# EAGLE board Schematic_without_SD_Card (EAGLE 9.6.2)
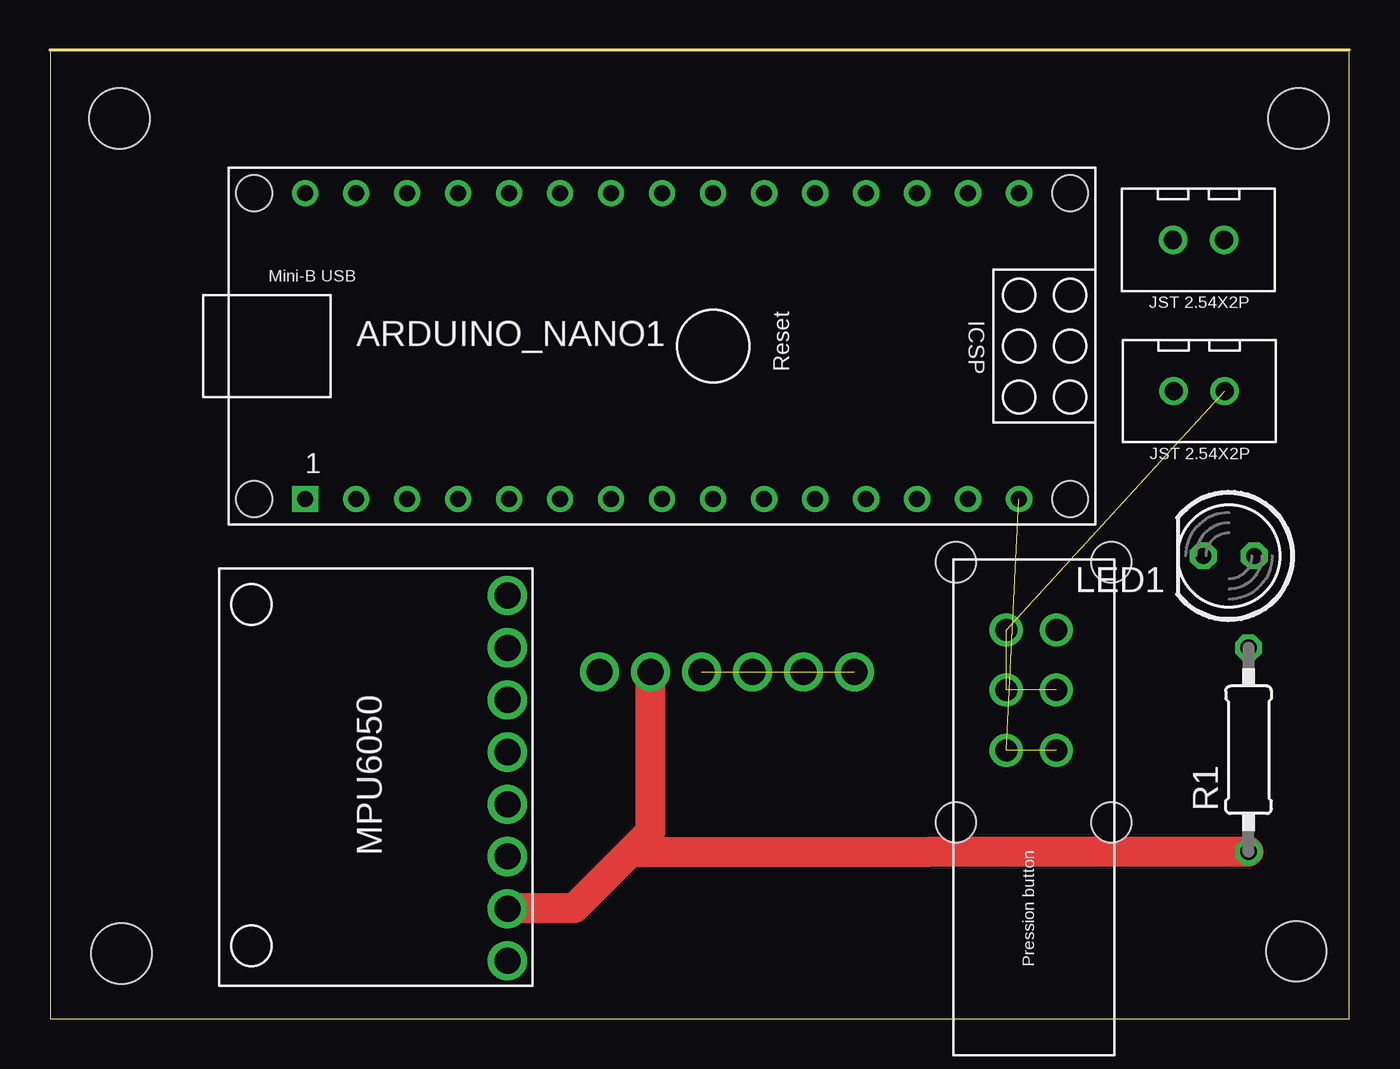
[diagram p0: board, top side]
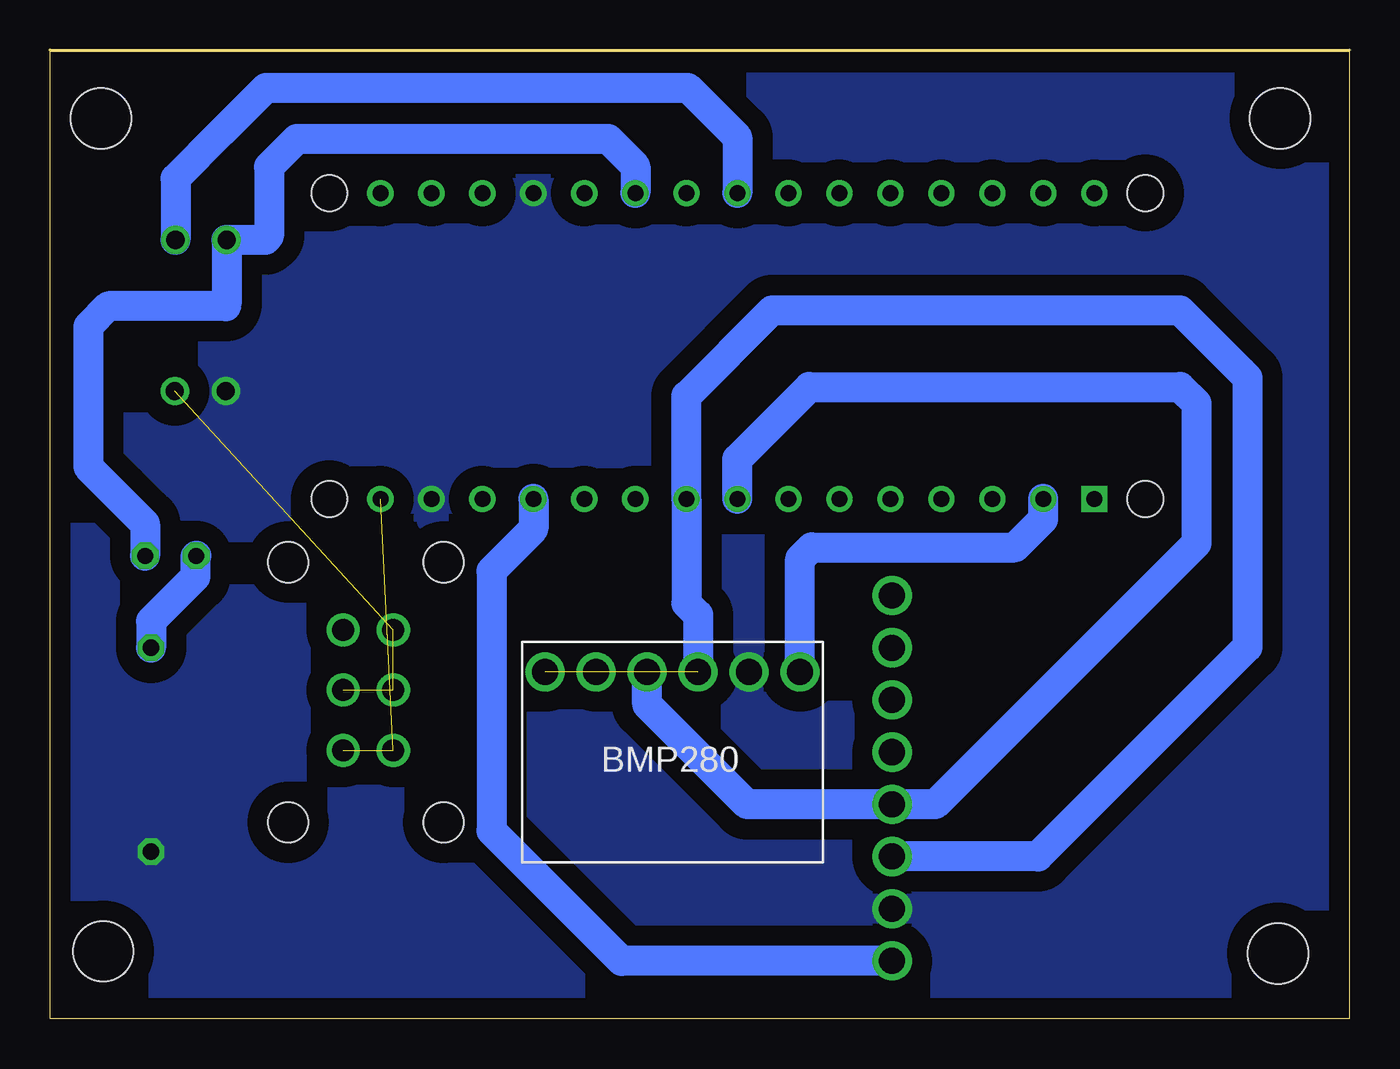
[diagram p1: board, bottom side, seen from below]

Size 64.71 x 48.25 mm. Coordinates in mm from the lower left corner, seen from the top.
Outline: 0,0 64.71,0 64.71,48.25 0,48.25 0,0
Copper layers (1*16): Top 0.035mm / dielectric 1.5mm / Bottom 0.035mm
Design rules "default *": minimum track width 1.5mm, minimum drill 0.35mm, track to track 1mm, track to pad 0.6mm, pad to pad 6mil, via to via 6mil, smd to smd 6mil, copper to edge 40mil, drill to drill 6mil, minimum pad ring 10mil, minimum via ring 8mil, stop-mask expansion 4mil, vias tented up to drill 0mil, thermal gap 10mil
Holes 3 mm at 3.56,3.25 62.06,3.36 3.45,44.86 62.18,44.86

## Footprints (pad centres in the part's own frame; a part is rotated, then mirrored left to right if it is on the bottom)
ARDUINO_NANO = drill 0.8 square: 1 -20.32,-7.62 | drill 0.8: 2 -17.78,-7.62; 3 -15.24,-7.62; 4 -12.7,-7.62; 5 -10.16,-7.62; 6 -7.62,-7.62; 7 -5.08,-7.62; 8 -2.54,-7.62; 9 0,-7.62; 10 2.54,-7.62; 11 5.08,-7.62; 12 7.62,-7.62; 13 10.16,-7.62; 14 12.7,-7.62; 15 15.24,-7.62; 16 15.24,7.62; 17 12.7,7.62; 18 10.16,7.62; 19 7.62,7.62; 20 5.08,7.62; 21 2.54,7.62; 22 0,7.62; 23 -2.54,7.62; 24 -5.08,7.62; 25 -7.62,7.62; 26 -10.16,7.62; 27 -12.7,7.62; 28 -15.24,7.62; 29 -17.78,7.62; 30 -20.32,7.62 | hole 1.778: -22.86,-7.62; -22.86,7.62; 17.78,7.62; 17.78,-7.62
LED5MM = drill 0.813 octagon: A -1.27,0; K 1.27,0
0207/10 = drill 0.813 octagon: 1 -5.08,0; 2 5.08,0
BMP280_FOOTPRINT = drill 1.3: CSB 3.686,-6.12; GND -3.934,-6.12; SCL -1.395,-6.12; SDA 1.145,-6.12; SDO 6.226,-6.12; VCC -6.474,-6.12
MPU6050_FOOTPRINT = drill 1.3: ADO 6.686,-10.184; GND -6.314,-10.184; INT 9.286,-10.184; SCL -3.715,-10.184; SDA -1.115,-10.184; VCC -8.915,-10.184; XCL 4.085,-10.184; XDA 1.486,-10.184
PRESSION_BUTTON_FOOTPRINT = drill 1.1: PL1 -7.803,-1.302; PL2 -4.803,-1.302; PL3 -1.803,-1.302; PR1 -7.803,1.198; PR2 -4.803,1.198; PR3 -1.803,1.198 | hole 2: -11.176,3.937; -11.176,-3.81; 1.778,-3.81; 1.778,3.937
JST2.54X2P_FOOTPRINT = drill 0.9: 1 -1.27,0; 2 1.27,0

## Placement (x,y rotation side)
ARDUINO_NANO1  [ARDUINO_NANO]  33.02,33.51 0 top
LED1  [LED5MM]  58.71,23.05 180 top
R1  [0207/10]  59.69,13.4 90 top
U$1  BMP280V1  [BMP280_FOOTPRINT]  33.83,11.16 180 bottom
U$2  MPU6050V1  [MPU6050_FOOTPRINT]  12.59,11.79 90 top
U$3  PRESSION_BUTTON  [PRESSION_BUTTON_FOOTPRINT]  48.92,11.57 270 top
U$5  JST2.54X2P  [JST2.54X2P_FOOTPRINT]  57.2,38.8 180 top
U$6  JST2.54X2P  [JST2.54X2P_FOOTPRINT]  57.23,31.26 180 top

## Library data of the parts
ARDUINO_NANO1 = ArduinoNanoV30
LED1 = led
R1 = rcl; SPICEPREFIX: R
U$1-U$3 U$5 U$6 = CRD

## Nets
GND: ARDUINO_NANO1.14 ARDUINO_NANO1.19 R1.1 U$1.GND U$2.GND U$6.2
N$1: ARDUINO_NANO1.2 U$1.VCC
N$2: ARDUINO_NANO1.9 U$1.SCL U$1.SDO U$2.SCL
N$3: ARDUINO_NANO1.8 U$1.CSB U$1.SDA U$2.SDA
N$4: ARDUINO_NANO1.15 U$3.PL3 U$3.PR3
N$5: ARDUINO_NANO1.12 U$2.VCC
N$10: LED1.K R1.2
N$11: ARDUINO_NANO1.21 LED1.A U$5.2
N$13: ARDUINO_NANO1.23 U$5.1
VCC: U$3.PL1 U$3.PL2 U$3.PR2 U$6.1

## Tracks (layer width: path | path; a pad name or v marks a point on that pad's centre or on a via)
GND
  Top 1.5: U$2.GND 22.82,5.52 26.11,5.52 28.95,8.35 | U$1.GND 29.89,9.3 28.95,8.35 | 28.95,8.35 28.98,8.32 43.81,8.32 R1.1
  pour Bottom: 0.81,47.49 0.81,0.49 64.81,0.49 64.81,47.49
N$1
  Bottom 1.5: ARDUINO_NANO1.2 15.24,24.89 16.65,23.48 26.78,23.48 27.36,22.9 U$1.VCC
N$2  (1 unrouted)
  Bottom 1.5: U$2.SCL 15.51,8.08 5.08,18.51 5.08,31.94 8.43,35.29 28.75,35.29 33.02,31.02 ARDUINO_NANO1.9 33.02,20.7 32.44,20.12 U$1.SCL
N$3  (1 unrouted)
  Bottom 1.5: ARDUINO_NANO1.8 30.48,27.89 26.89,31.48 8.44,31.48 7.62,30.66 7.62,23.68 20.62,10.68 U$2.SDA 30,10.68 34.98,15.66 U$1.SDA
N$4  (2 unrouted)
N$5
  Bottom 1.5: U$2.VCC 36.25,2.88 42.74,9.37 42.74,22.3 40.64,24.4 ARDUINO_NANO1.12
N$10
  Bottom 1.5: LED1.K 57.48,23.01 57.48,22.02 59.69,19.81 R1.2
N$11
  Bottom 1.5: LED1.A 59.98,24.66 62.81,27.49 62.81,34.49 61.81,35.49 55.95,35.49 55.93,35.61 U$5.2 54,38.8 53.81,38.99 53.81,42.44 52.42,43.83 36.92,43.83 35.56,42.47 ARDUINO_NANO1.21
N$13
  Bottom 1.5: ARDUINO_NANO1.23 30.48,43.91 32.94,46.37 53.96,46.37 56.15,44.18 58.47,41.86 U$5.1
VCC  (3 unrouted)